# EAGLE board ACRoBaT - main board (EAGLE 7.4.0)
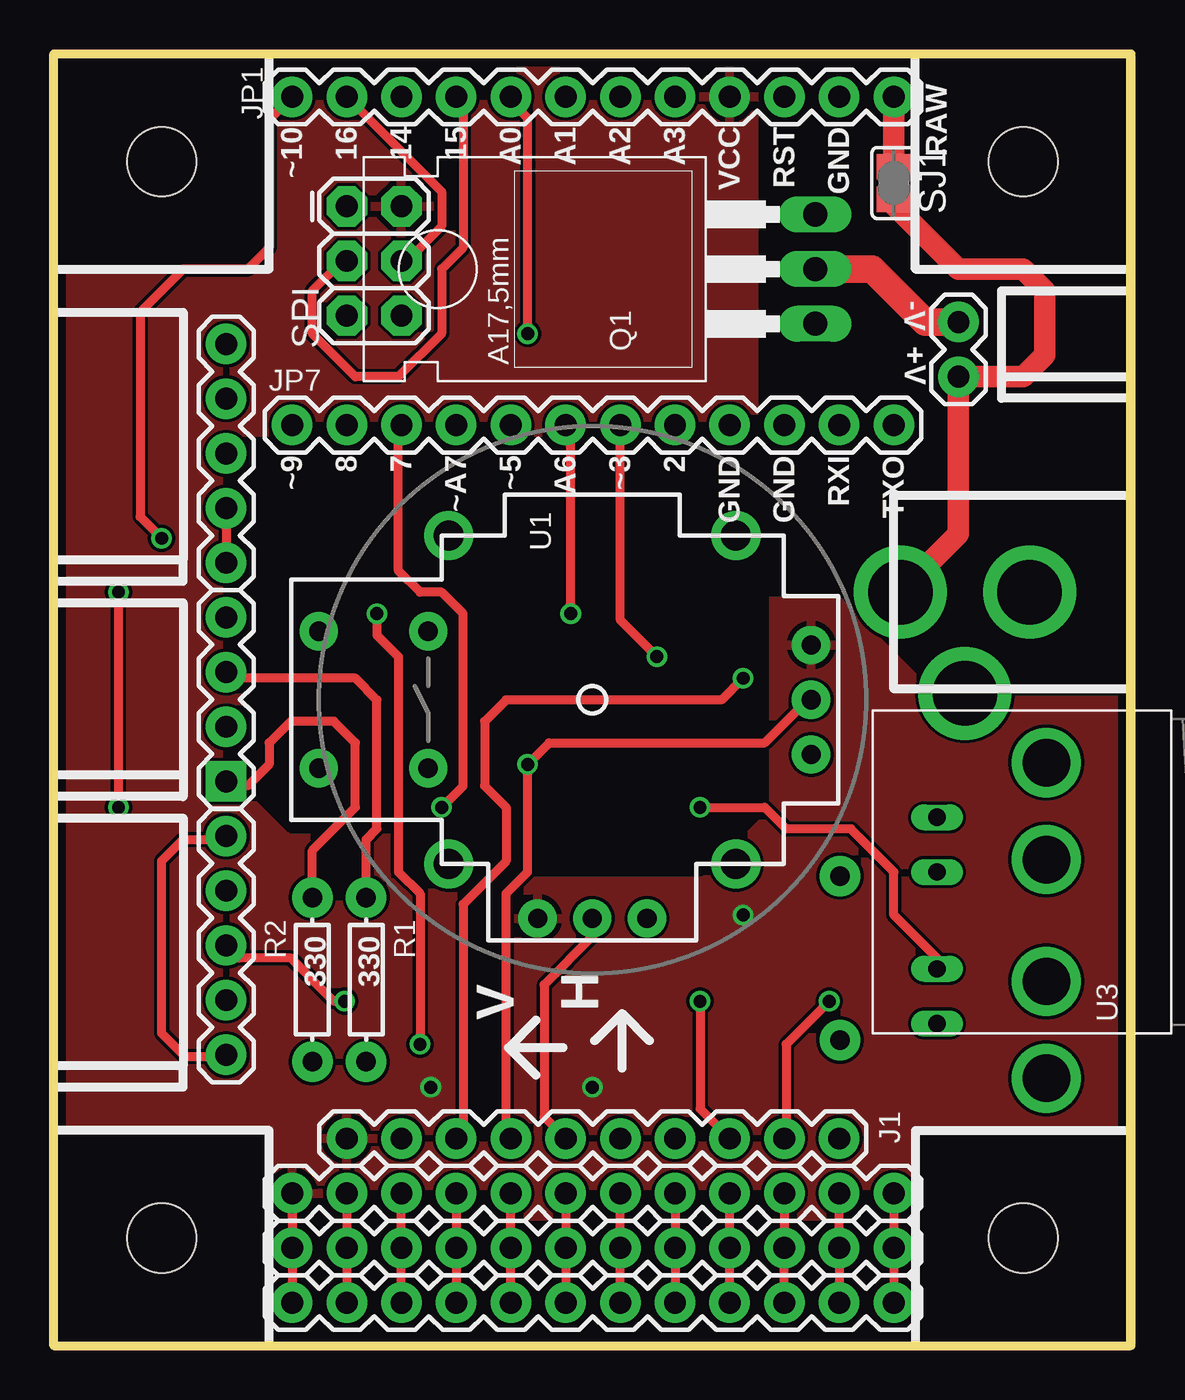
[diagram p0: board, top side]
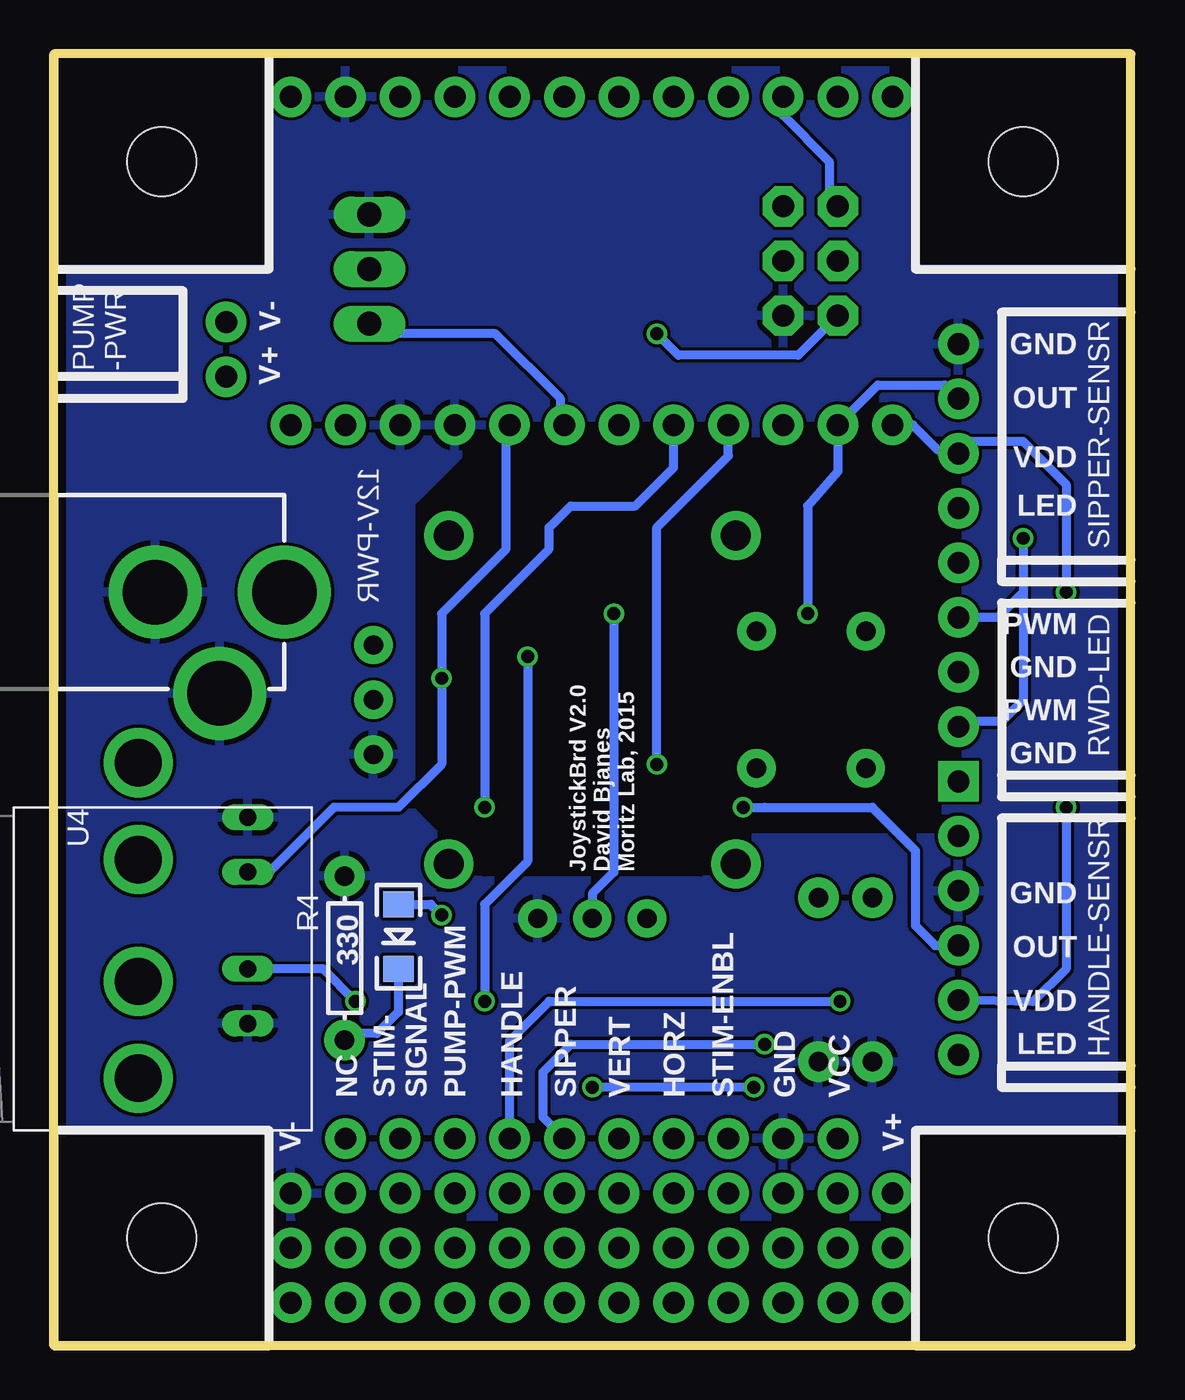
[diagram p1: board, bottom side, seen from below]

Size 50 x 60 mm. Coordinates in mm from the lower left corner, seen from the top.
Outline: 0,0 50,0 50,60 0,60 0,0
Copper layers (1*16): Top 0.0356mm / dielectric 1.5011mm / Bottom 0.0356mm
Design rules "LaenPCBOrder": minimum track width 6mil, minimum drill 13mil, track to track 6mil, track to pad 6mil, pad to pad 6mil, via to via 6mil, smd to smd 6mil, copper to edge 15mil, drill to drill 6mil, minimum pad ring 7mil, minimum via ring 7mil, stop-mask expansion 3mil, vias tented up to drill 0mil, thermal gap 10mil
Holes 3.2 mm at 5,5 5,55 45,55 45,5
tRestrict: area 9,22 to 37,42
bRestrict: area 9,22 to 33,42

## Footprints (pad centres in the part's own frame; a part is rotated, then mirrored left to right if it is on the bottom)
POWER_JACK_PTH = drill 2.997 pad 4.318: GND 0,7.7; GNDBREAK 4.7,10.7; PWR 0,13.7
LED-1206 = smd 1.2 x 1.4: A -1.5,0; C 1.5,0
1X05 = drill 1.016 pad 1.88: 1 0,0; 2 2.54,0; 3 5.08,0; 4 7.62,0; 5 10.16,0
1X10 = drill 1.016 pad 1.88: 1 0,0; 2 2.54,0; 3 5.08,0; 4 7.62,0; 5 10.16,0; 6 12.7,0; 7 15.24,0; 8 17.78,0; 9 20.32,0; 10 22.86,0
1X12 = drill 1.016 pad 1.88: 1 0,0; 2 2.54,0; 3 5.08,0; 4 7.62,0; 5 10.16,0; 6 12.7,0; 7 15.24,0; 8 17.78,0; 9 20.32,0; 10 22.86,0; 11 25.4,0; 12 27.94,0
1X02 = drill 1.016 pad 1.88: 1 0,0; 2 2.54,0
TO220 = drill 1.118 long: 1 -2.54,-6.35; 2 0,-6.35; 3 2.54,-6.35
AXIAL-0.3 = drill 0.9 pad 1.88: P$1 -3.81,0; P$2 3.81,0
1X04 = drill 1.016 pad 1.88 square: 1 0,0 | drill 1.016 pad 1.88: 2 2.54,0; 3 5.08,0; 4 7.62,0
SJ = smd 1.168 x 1.6: 1 -0.762,0; 2 0.762,0
2X3 = drill 1.016 pad 1.88 octagon: 1 0,0; 2 0,2.54; 3 2.54,0; 4 2.54,2.54; 5 5.08,0; 6 5.08,2.54
JOYSTICK = drill 0.9 pad 1.778: B1A -3.175,12.7; B1B 3.175,12.7; B2A -3.175,7.62; B2B 3.175,7.62 | drill 0.889 pad 1.778: H1 -2.54,-10.16; H2 0,-10.16; H3 2.54,-10.16; V1 -10.16,2.54; V2 -10.16,0; V3 -10.16,-2.54 | drill 1.397 pad 2.286: MOUNT1 -7.62,6.668; MOUNT2 -7.62,-6.668; MOUNT3 7.62,-6.668; MOUNT4 7.62,6.668
BNC = drill 2.2: 3 -5.08,5.08; 4 5.08,5.08 | drill 0.8 long: GND -2.54,0; S 0,0

## Placement (x,y rotation side)
12V-PWR  POWER_JACKPTH  [POWER_JACK_PTH]  53,35 270 bottom
D3  WHITE  [LED-1206]  34,19 270 bottom
HANDLE-SENSR  J3  [1X05]  8,13.51 90 top
J1  [1X10]  36.46,9.62 180 top
JP1  [1X12]  39,58 180 top
JP4  [1X12]  39,7.08 180 top
JP7  [1X12]  39,42.76 180 top
JP10  [1X12]  39,4.54 180 top
JP11  [1X12]  39,2 180 top
PUMP-PWR  [1X02]  42,45 90 top
Q1  BUZ10  [TO220]  29,50 90 top
R1  330  [AXIAL-0.3]  14.5,17 270 top
R2  330  [AXIAL-0.3]  12,17 270 top
R4  330  [AXIAL-0.3]  36.5,18 270 bottom
RWD-LED  [1X04]  8,26.2 90 top
SIPPER-SENSR  J2  [1X05]  8,36.36 90 top
SJ1  [SJ]  39,54 270 top
SPI  FEMALE 2x3  [2X3]  13.6,52.92 270 top
U1  JOYSTICKPTH  [JOYSTICK]  25,30 90 top
U3  BNCPTH  [BNC]  41,22 270 top
U4  BNCPTH  [BNC]  41,17.5 90 bottom

## Library data of the parts
12V-PWR = SparkFun-Connectors; PROD_ID: CONN-08197
D3 = SparkFun-LED; PROD_ID: DIO-09955
HANDLE-SENSR JP1 JP4 JP7 JP10 JP11 PUMP-PWR RWD-LED SIPPER-SENSR U3 U4 = SparkFun-Connectors
J1 = SparkFun-Connectors; PROD_ID: CONN-11563
Q1 = transistor-fet
R1 R2 R4 = SparkFun-Passives
SJ1 = jumper
SPI = SparkFun-Connectors; PROD_ID: CONN-11566
U1 = SparkFun

## Nets
CAP_BRD_PWR: HANDLE-SENSR.2 JP7.12 SIPPER-SENSR.3
GND: 12V-PWR.GND 12V-PWR.GNDBREAK HANDLE-SENSR.4 J1.9 JP1.2 JP4.1 JP7.3 JP7.4 JP10.1 JP11.1 Q1.3 R1.P$2 R2.P$2 R4.P$1 SIPPER-SENSR.5 SPI.6 U1.H1 U1.V3 U3.GND U4.GND
HANDLE_OUT: HANDLE-SENSR.3 J1.4 JP7.10
HORZ: J1.7 JP7.9 U1.H2
MISO: JP1.10 SPI.1
MOSFET_CTRL: J1.3 JP7.6 Q1.1
MOSI: JP1.11 SPI.4
N$1: HANDLE-SENSR.1 HANDLE-SENSR.5
N$2: SIPPER-SENSR.1 SIPPER-SENSR.2
N$3: D3.C R4.P$2
N$5: JP4.11 JP10.11 JP11.11
N$6: R1.P$1 RWD-LED.3
N$7: R2.P$1 RWD-LED.1
N$8: JP4.10 JP10.10 JP11.10
N$9: JP4.9 JP10.9 JP11.9
N$10: JP4.8 JP10.8 JP11.8
N$11: JP4.7 JP10.7 JP11.7
N$12: JP4.6 JP10.6 JP11.6
N$13: JP4.5 JP10.5 JP11.5
N$14: JP4.4 JP10.4 JP11.4
N$15: JP4.3 JP10.3 JP11.3
N$16: JP4.2 JP10.2 JP11.2
N$21: PUMP-PWR.2 Q1.2
N$33: JP1.1 SJ1.1
RWD_LED_1: JP1.12 RWD-LED.2 RWD-LED.4
SCK: JP1.9 SPI.3
SEL: U1.B1A
SIPPER_OUT: J1.5 JP7.11 SIPPER-SENSR.4
SS: JP1.8 SPI.5
STIM_ENBL: J1.8 JP7.5 U3.S
STIM_PWM: J1.2 JP7.8 U4.S
V+: 12V-PWR.PWR PUMP-PWR.1 SJ1.2
VCC: D3.A J1.10 JP1.4 JP4.12 JP10.12 JP11.12 SPI.2 U1.H3 U1.V1
VERT: J1.6 JP7.7 U1.V2

## Tracks (layer width: path | path; a pad name or v marks a point on that pad's centre or on a via)
CAP_BRD_PWR  (via drill 0.6)
  Top 0.406: v3,35 v3,25
  Bottom 0.406: HANDLE-SENSR.2 4.54,15.97 3,17.51 v3,25 | v3,35 3,40 5,42 7.44,42 SIPPER-SENSR.3 8.16,41.6 8.96,41.6 10.12,42.76 JP7.12
GND
  Top 0.406: JP4.1 JP10.1 JP11.1
  pour Bottom: 0,10 0,50 10,50 10,60 40,60 40,50 50,50 50,10 40,10 40,6 10,6 10,10
HANDLE_OUT  (via drill 0.6)
  Top 0.406: v18,25 19,26 19,34 18,35 17,35 16,36 16,42.62 JP7.10 | v13.5,16 13,16 11,18 8.59,18 HANDLE-SENSR.3
  Bottom 0.406: J1.4 28.84,14.16 27,16 v13.5,16 | 17,25 v18,25 12,25 10,23 10,19.51 9.08,18.59 HANDLE-SENSR.3
HORZ  (via drill 0.6)
  Top 0.406: U1.H2 35,30 33,28 23,28 v22,27 22,22 21,21 21,9.84 J1.7
  Bottom 0.406: v22,27 22,38 18.68,41.32 JP7.9
MISO
  Bottom 0.406: JP1.10 16.14,57.14 14,55 14,53.32 SPI.1
MOSFET_CTRL  (via drill 0.6)
  Top 0.406: v30,16 30,11 J1.3 | JP7.6 26.3,33.7 v28,32
  Bottom 0.406: Q1.1 35.89,47 29.5,47 26.5,44 26.5,42.96 JP7.6 | v28,32 28,22.5 30,20.5 v30,16
MOSI
  Top 0.406: JP1.11 18,53.6 18,52 16.38,50.38 SPI.4
N$1
  Top 0.406: HANDLE-SENSR.5 7.92,23.51 6,23.51 5,22.51 5,14.51 6.08,13.43 8,13.43 HANDLE-SENSR.1
N$2
  Top 0.406: SIPPER-SENSR.2 SIPPER-SENSR.1
N$3
  Bottom 0.406: D3.C 34,15.5 35,14.5 36.19,14.5 R4.P$2
N$5
  Top 0.406: JP4.11 JP10.11 JP11.11
N$6
  Top 0.406: R1.P$1 14.5,23.5 15,24 15,30 14,31 8.29,31 RWD-LED.3
N$7
  Top 0.406: R2.P$1 12,23 14,25 14,28 13,29 11,29 10,28 10,27 9,26 8.21,26 RWD-LED.1
N$8
  Top 0.406: JP11.10 JP10.10 JP4.10
N$9
  Top 0.406: JP4.9 JP10.9 JP11.9
N$10
  Top 0.406: JP11.8 JP10.8 JP4.8
N$11
  Top 0.406: JP4.7 JP10.7 JP11.7
N$12
  Top 0.406: JP11.6 JP10.6 JP4.6
N$13
  Top 0.406: JP4.5 JP10.5 JP11.5
N$14
  Top 0.406: JP11.4 JP10.4 JP4.4
N$15
  Top 0.406: JP4.3 JP10.3 JP11.3
N$16
  Top 0.406: JP11.2 JP10.2 JP4.2
N$21
  Top 1.27: PUMP-PWR.2 40.46,47.54 38,50 Q1.2
N$33
  Top 1: SJ1.1 JP1.1
RWD_LED_1  (via drill 0.6)
  Top 0.406: JP1.12 10,56.94 10,51 9,50 6,50 4,48 4,38.5 v5,37.5
  Bottom 0.406: RWD-LED.2 7.75,29 6,29 5,30 5,35 | v5,37.5 5,35 | RWD-LED.4 6.17,33.83 5,35
SCK
  Top 0.406: SPI.3 13.38,50.38 12,49 12,47 14,45 16,45 18,47 18,50 19,51 19,57.68 JP1.9
SIPPER_OUT  (via drill 0.6)
  Top 0.406: v15,34 15,33 16,32 16,22 17,21 v17,14
  Bottom 0.406: v17,14 26,14 27.3,12.7 27.3,10.62 J1.5 | v15,34 15,39 13.6,40.6 JP7.11 11.74,44.62 8.64,44.62 SIPPER-SENSR.4
SS  (via drill 0.6)
  Top 0.406: v22,47 22,57 21.22,57.78 JP1.8
  Bottom 0.406: SPI.5 15.44,46 21,46 v22,47
STIM_ENBL  (via drill 0.6)
  Top 0.406: v32,31 31,30 21,30 20,29 20,26 21,25 21,22.5 19,20.5 19,10 18.68,9.68 J1.8
  Bottom 0.406: U3.S 40,22 37,25 34,25 32,27 v32,31 32,34 29,37 29,42.6 JP7.5
STIM_PWM  (via drill 0.6)
  Top 0.406: v30,25 33,25 34,24 37,24 39,22 39,20 41,18 U4.S | J1.2 34,9.7 34,14 v36,16
  Bottom 0.406: v30,25 30,34 27,37 27,38 26,39 23,39 21.22,40.78 JP7.8 | v36,16 37.5,17.5 U4.S
V+
  Top 0.406: SJ1.2 39,53
  Top 1: 39,53 42,50 45,50 46,49 46,46 45,45 PUMP-PWR.1 42,37.7 12V-PWR.PWR
VCC  (via drill 0.6)
  Top 0.406: JP4.12 JP10.12 JP11.12
  Bottom 0.406: v17.5,12 v25,12 | D3.A 32.5,20.5 v32,20
  pour Top: 0,10 0,50 10,50 10,60 32.5,60 32.5,38.5 41,30 50,30 50,10 40,10 40,6 10,6 10,10
VERT  (via drill 0.6)
  Top 0.406: U1.V2 25,19 22.76,16.76 22.76,10.62 J1.6 | v24,34 24,42 23.76,42.24 JP7.7
  Bottom 0.406: v24,34 24,22 25,21 U1.V2

## Text on the board
tPlace: H | V
tNames: RAW | ~10 | 16 | 14 | 15 | A0 | A1 | A2 | A3 | VCC | RST | GND | V- | V+ | ~9 | 8 | 7 | ~A7 | ~5 | A6 | ~3 | 2 | GND | GND | RXI | TXO
bNames: GND | V- | OUT | V+ | PUMP / -PWR | VDD | LED | PWM | GND | PWM | GND | GND | JoystickBrd V2.0 / David Bjanes / Moritz Lab, 2015 | OUT | VDD | LED | VCC | GND | STIM-ENBL | HORZ | VERT | SIPPER | HANDLE | PUMP-PWM | STIM- / SIGNAL | NC | V+ | V-